# Altium PCB PCB1.PcbDoc
Units mil, origin at the board's own origin, x right, y up, seen from the top; angles counter-clockwise.
Board outline 6000 x 4000 mil, 4 copper layers (Top Layer, Layer 1, Layer 2, Bottom Layer), stack 23.756 mil thick; 28 components, 62 nets, 156 pads, 27 vias.
Unrouted connection lines stored in the file: 83.
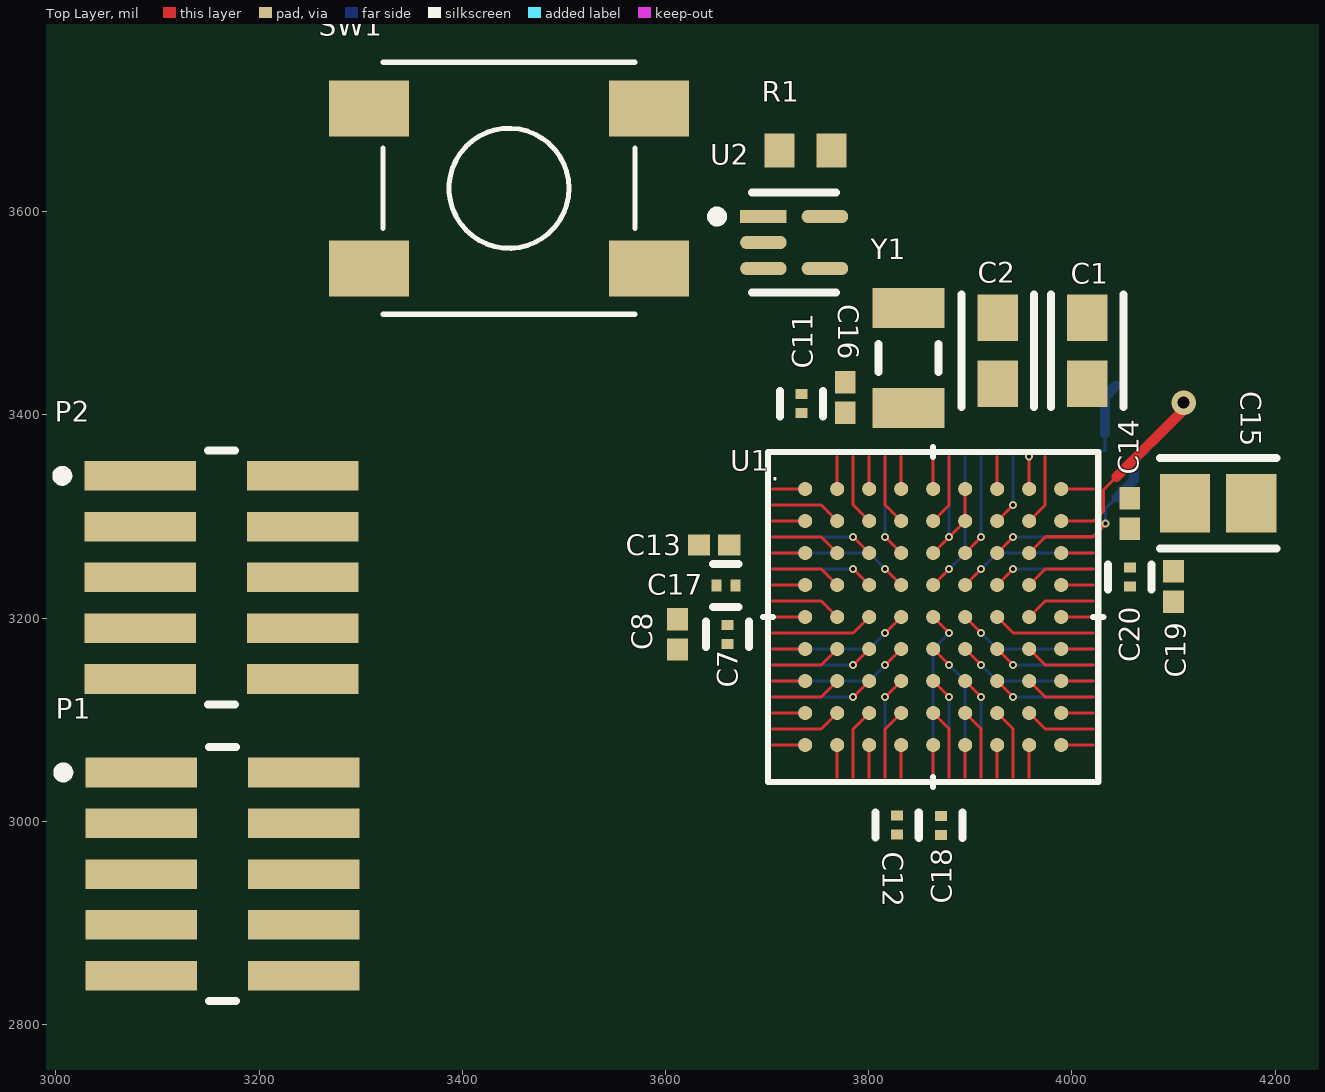
[diagram p0: Top Layer view]
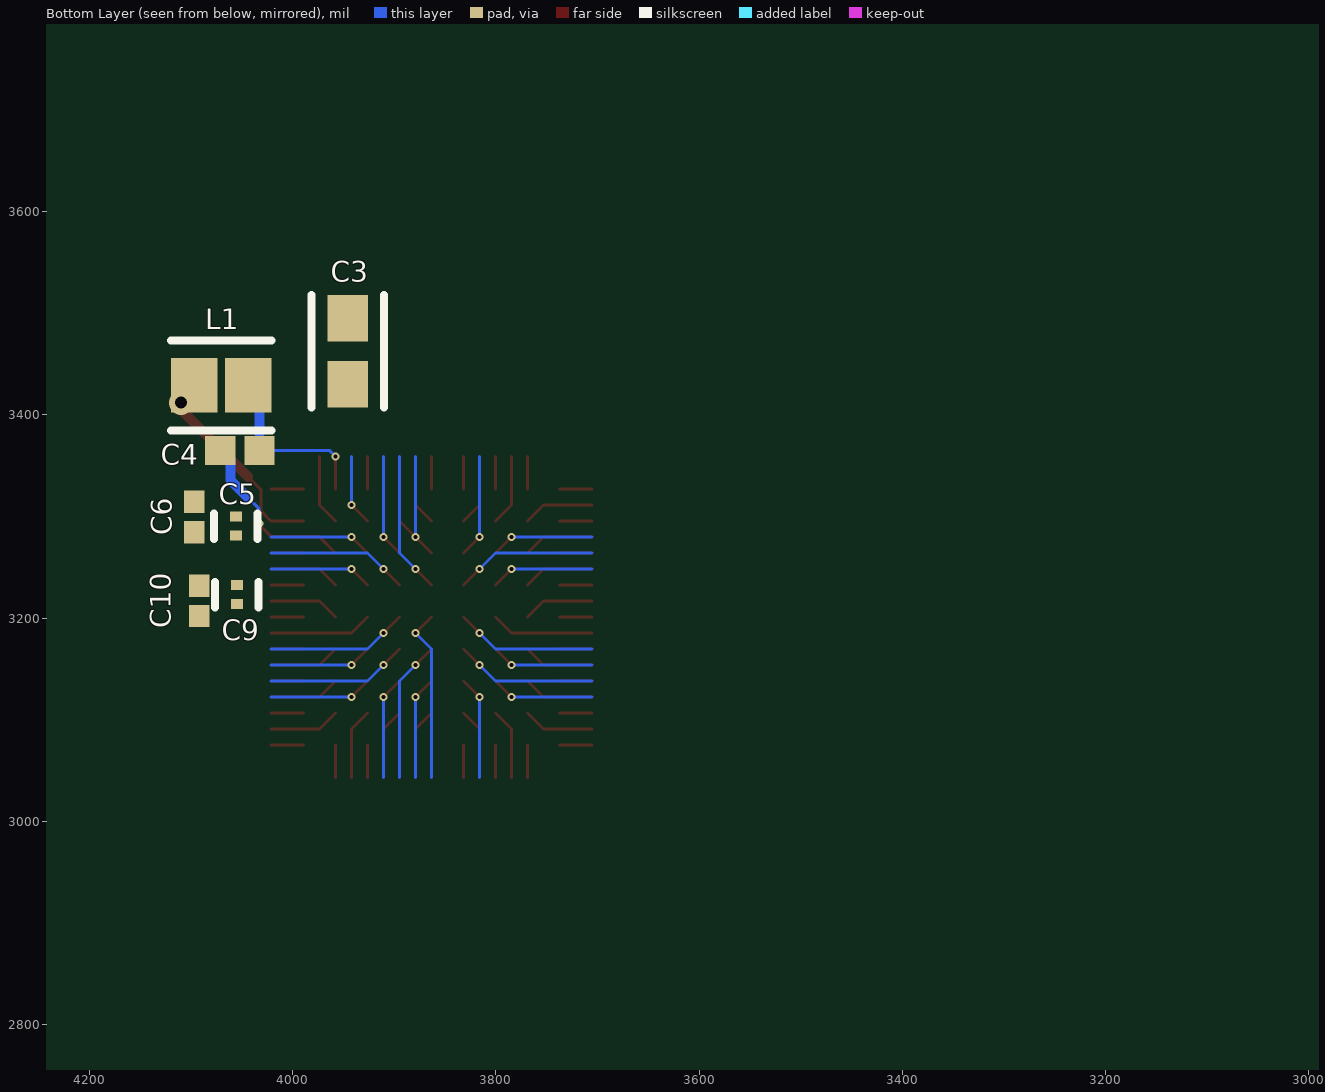
[diagram p1: Bottom Layer view, seen from below]
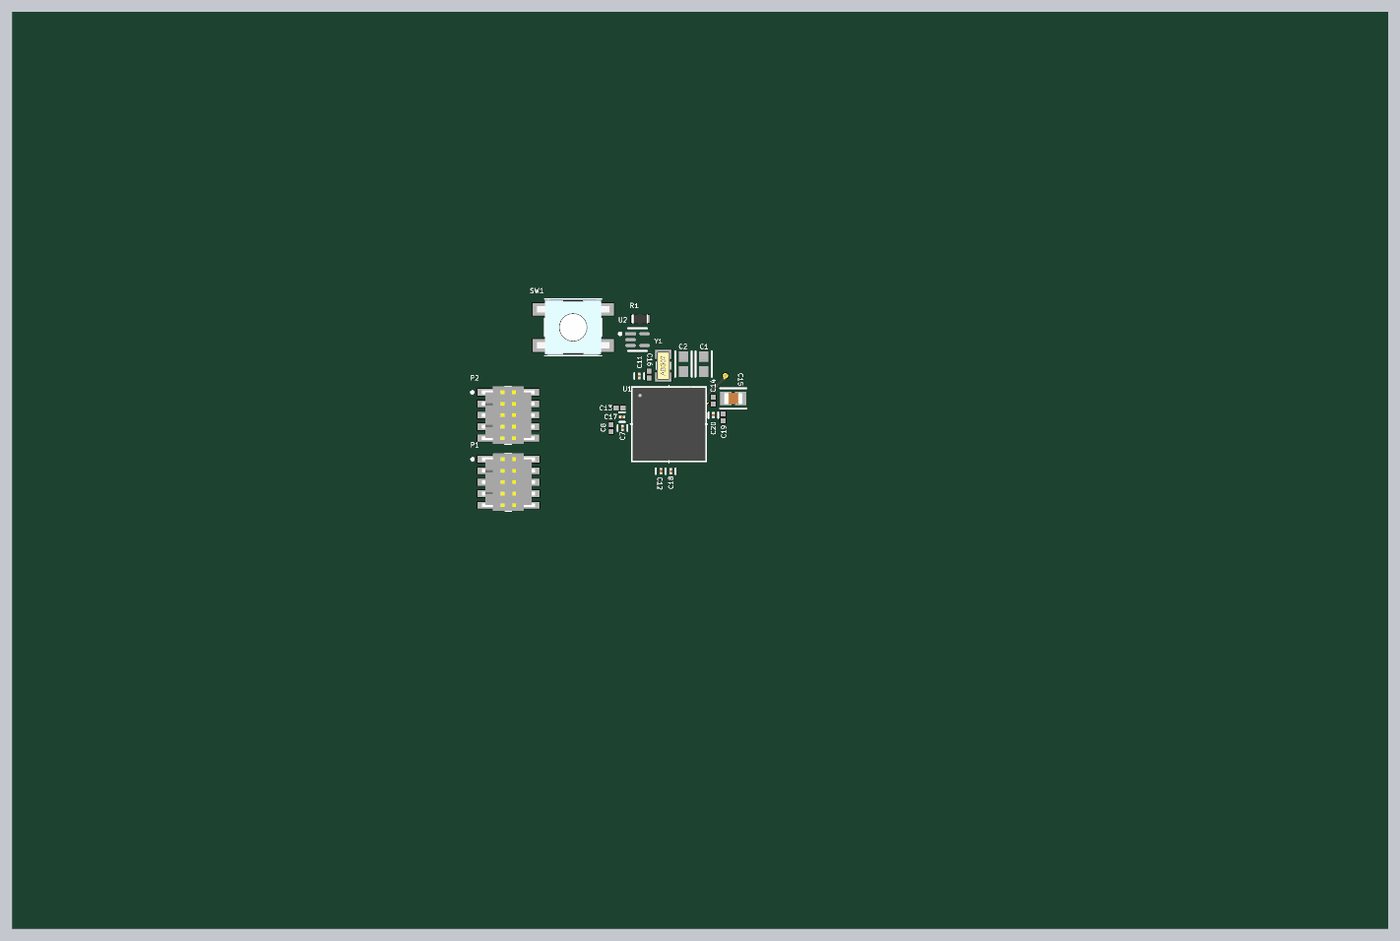
[diagram p2: 3D render of the assembled board from above, using the file's embedded part models]
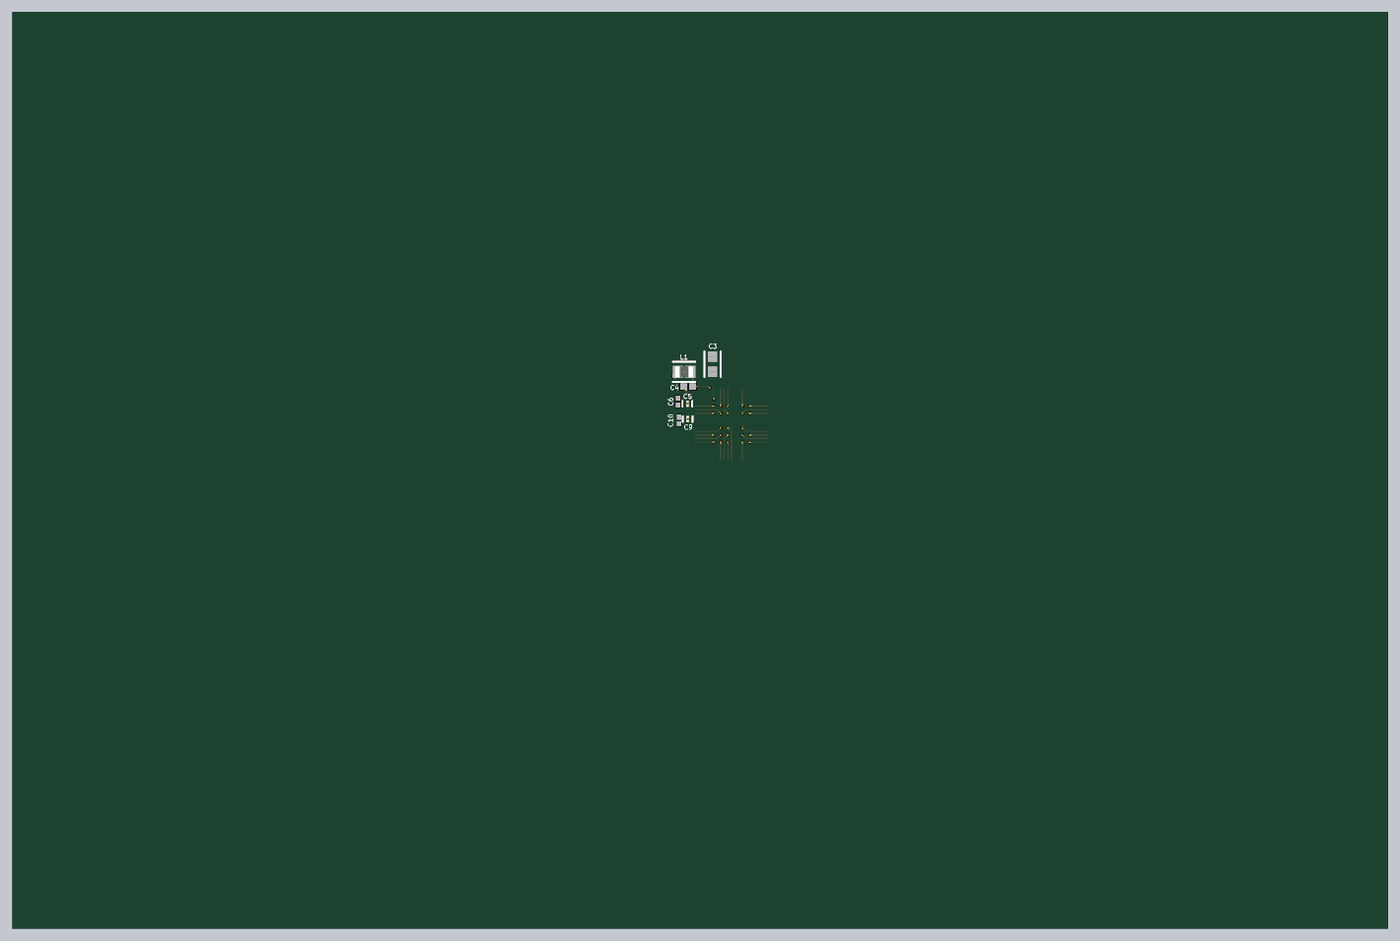
[diagram p3: 3D render of the assembled board from below, using the file's embedded part models]

## Layer stack, top to bottom
Top Solder: solder mask 0.4, Solder Resist, Dk 3.5
Top Layer: signal copper 1.4
Dielectric 2: prepreg 2.8, PP-006, Dk 4.1
Layer 1: signal copper 1.378
Dielectric 1: dielectric 12.6, FR-4, Dk 4.8
Layer 2: signal copper 1.378
Dielectric 3: prepreg 2.8, PP-006, Dk 4.1
Bottom Layer: signal copper 1.4
Bottom Solder: solder mask 0.4, Solder Resist, Dk 3.5

## Board outline
1000,1000 7000,1000 7000,5000 1000,5000

## Design rules (kind name [scope] priority, off if disabled: settings)
Clearance Clearance_BGA [WithinRoom('BGA')] p1: gap=3 ignorepadtopadclearanceinfootprint=FALSE
Clearance Clearance_1 [All] p2: gap=5 ignorepadtopadclearanceinfootprint=FALSE
FanoutControl Fanout_BGA [IsBGA or WithinRoom('BGA')] p1: bgadir=Out bgaviamode=Centered fanoutstyle=BGA fanoutdirection=Alternating viagrid=1 // Fanout_BGA (Default Rule)
PolygonConnect [All] p1: connectstyle=Relief reliefconductorwidth=10 reliefentries=4 polygonreliefangle="90 Angle" airgapwidth=10
RoomDefinition BGA [InComponentClass('Room Definition 1')] p1: confinementstyle=ConfineIn formatcopy=TRUE lockcomponents=FALSE outline 3683,3020.5 3683,3381.5 4044,3381.5 4044,3020.5
RoutingVias RoutingVias_BGA [WithinRoom('BGA')] p1: holewidth=4 width=8 viastyle="Through Hole" minholewidth=4 minwidth=8 maxholewidth=4 maxwidth=8
RoutingVias RoutingVias_1 [All] p2: holewidth=28 width=50 viastyle="Through Hole" minholewidth=28 minwidth=50 maxholewidth=28 maxwidth=50
SolderMaskExpansion [All] p1: expansion=4 istentingtop=FALSE
Width Width_BGA [WithinRoom('BGA')] p1: maxlimit=3 minlimit=3 preferedwidth=3
Width Width_1 [All] p2: maxlimit=10 minlimit=10 preferedwidth=10
29 further rules are at their usual default settings.

## Classes and differential pairs
component class "Room Definition 1": U1

## Components (designator, comment, footprint, x,y, rotation, side; value= is the part's Value field where it differs from the comment)
C1 "CL10A226MO7JZNC" FP-CL10-IPC_A 4015,3463 r90 top
C2 "CL10A226MO7JZNC" FP-CL10-IPC_A 3927,3463 r90 top
C3 "CL10A226MO7JZNC" FP-CL10-IPC_A 3946,3462.56 r90 bottom
C4 "GRM155R71H332KA01D" CAPC1005X55X25ML05T10 4052,3365 r180 bottom value="3300 pF"
C5 "GRM033R61C104KE14D" FP-GRM033-0_03-MFG 4056,3290.35 r90 bottom
C6 "C0402C105K8PAC7867" CAPC1005X60X30LL05T10 4097,3299.35 r270 bottom value=1uF
C7 "GRM033R61C104KE14D" FP-GRM033-0_03-MFG 3661,3184 r270 top
C8 "C0402C105K8PAC7867" CAPC1005X60X30LL05T10 3612,3184 r90 top value=1uF
C9 "GRM033R61C104KE14D" FP-GRM033-0_03-MFG 4055,3223 r270 bottom
C10 "C0402C105K8PAC7867" CAPC1005X60X30LL05T10 4092,3217 r90 bottom value=1uF
C11 "GRM033R61C104KE14D" FP-GRM033-0_03-MFG 3734,3411 r90 top
C12 "GRM033R61C104KE14D" FP-GRM033-0_03-MFG 3828,2996.35 r270 top
C13 "C0402C105K8PAC7867" CAPC1005X60X30LL05T10 3648,3272 r0 top value=1uF
C14 "C0402C105K8PAC7867" CAPC1005X60X30LL05T10 4057,3303 r270 top value=1uF
C15 "GRM21BR61A476ME15K" FP-GRM21B-0_2-e0_2_0_7-IPC_B 4144,3313 r0 top
C16 "C0402C105K8PAC7867" CAPC1005X60X30LL05T10 3777,3417 r270 top value=1uF
C17 "GRM033R61C104KE14D" FP-GRM033-0_03-MFG 3659.35,3232 r180 top
C18 "GRM033R61C104KE14D" FP-GRM033-0_03-MFG 3871,2996 r270 top
C19 "C0402C105K8PAC7867" CAPC1005X60X30LL05T10 4100,3231.04 r90 top value=1uF
C20 "GRM033R61C104KE14D" FP-GRM033-0_03-MFG 4057,3240.35 r270 top
L1 "MLP2012H2R2MT0S1" FP-MLP2012M-IPC_C 4070.39,3429 r0 bottom
P1 "FTSH-105-01-L-DV-K" SMTC-FTSH-105-01-L-DV-K_V 3164,2948 r270 top
P2 "FTSH-105-01-L-DV-K" SMTC-FTSH-105-01-L-DV-K_V 3163,3240 r270 top
R1 "ERJ3EKF1002V" RESC1609X55X30LL15T15 3738,3660 r180 top
SW1 "430481025816" 430481025816 3446,3623 r0 top
U1 "MAX78000EXG+" 21-0735_MXM 3863.5,3201 r0 top
U2 "SN74LVC1G07DCKR" FP-DCK0005A-IPC_C 3726.68,3569.59 r0 top
Y1 "ABS07-120-32.768KHZ-T" ABRA-ABS07_A_V 3839,3456 r90 top

## Footprints (in the part's own frame and the unit in brackets; to place one, negate y for a bottom-side part, rotate by r counter-clockwise, add the part's x,y. Pads: shape width x height; smd on the part's side, far side on the other; paste and mask are expansions set on the pad)
21-0735_MXM [mil]
  round 14 smd paste+0 mask+0: A1(-125.98,125.98) A2(-94.49,125.98) A3(-62.99,125.98) A4(-31.5,125.98) A5(0,125.98) A6(31.5,125.98) A7(62.99,125.98) A8(94.49,125.98) A9(125.98,125.98) B1(-125.98,94.49) B2(-94.49,94.49) B3(-62.99,94.49) B4(-31.5,94.49) B5(0,94.49) B6(31.5,94.49) B7(62.99,94.49) B8(94.49,94.49) B9(125.98,94.49) C1(-125.98,62.99) C2(-94.49,62.99) C3(-62.99,62.99) C4(-31.5,62.99) C5(0,62.99) C6(31.5,62.99) C7(62.99,62.99) C8(94.49,62.99) C9(125.98,62.99) D1(-125.98,31.5) D2(-94.49,31.5) D3(-62.99,31.5) D4(-31.5,31.5) D5(0,31.5) D6(31.5,31.5) D7(62.99,31.5) D8(94.49,31.5) D9(125.98,31.5) E1(-125.98,0) E2(-94.49,0) E3(-62.99,0) E4(-31.5,0) E5(0,0) E6(31.5,0) E7(62.99,0) E8(94.49,0) E9(125.98,0) F1(-125.98,-31.5) F2(-94.49,-31.5) F3(-62.99,-31.5) F4(-31.5,-31.5) F5(0,-31.5) F6(31.5,-31.5) F7(62.99,-31.5) F8(94.49,-31.5) F9(125.98,-31.5) G1(-125.98,-62.99) G2(-94.49,-62.99) G3(-62.99,-62.99) G4(-31.5,-62.99) G5(0,-62.99) G6(31.5,-62.99) G7(62.99,-62.99) G8(94.49,-62.99) G9(125.98,-62.99) H1(-125.98,-94.49) H2(-94.49,-94.49) H3(-62.99,-94.49) H4(-31.5,-94.49) H5(0,-94.49) H6(31.5,-94.49) H7(62.99,-94.49) H8(94.49,-94.49) H9(125.98,-94.49) J1(-125.98,-125.98) J2(-94.49,-125.98) J3(-62.99,-125.98) J4(-31.5,-125.98) J5(0,-125.98) J6(31.5,-125.98) J7(62.99,-125.98) J8(94.49,-125.98) J9(125.98,-125.98)
  silkscreen extent -168,-168 168,168, body extent -157,-157 157,157, height 51
430481025816 [mm] "6*6mm vertical type,SMD, height 2.5mm, black actuator, 160gf, T&R"
  rect 2x1.4 smd: 1(-3.5,2) 2(3.5,2) 3(-3.5,-2) 4(3.5,-2)
  silkscreen extent -3.15,-3.15 3.15,3.15, body extent -4,-3.1 4,3.1, height 2.49
ABRA-ABS07_A_V [mm] "SMD, 2-Leads, Body 3.2x1.5mm"
  rect 1x1.8 smd: 1(-1.25,0) 2(1.25,0)
  silkscreen extent -0.35,-0.75 0.35,0.75, body extent -1.6,-0.75 1.6,0.75, height 0.9
CAPC1005X55X25ML05T10 [mm] "Chip Capacitor, 2-Leads, Body 1.00x0.50mm, IPC Low Density"
  rect 0.76x0.72 smd: 1(-0.49,0) 2(0.49,0)
  body extent -0.53,-0.28 0.53,0.27, height 0.55
CAPC1005X60X30LL05T10 [mm] "Chip Capacitor, 2-Leads, Body 1.00x0.50mm, IPC High Density"
  rect 0.56x0.52 smd: 1(-0.38,0) 2(0.38,0)
  body extent -0.53,-0.28 0.53,0.28, height 0.6
FP-CL10-IPC_A [mil]
  rect 45.6x39.85 smd paste+0 mask+0: 1(-32.56,0) 2(32.56,0)
  silkscreen extent -55,-36 55,36, body extent -31,-16 31,16, height 36
FP-DCK0005A-IPC_C [mm]
  rect 1.164x0.336 smd paste+0 mask+0: 1(-0.77,0.65)
  rrect100% 1.164x0.336 smd paste+0 mask+0: 2(-0.77,0) 3(-0.77,-0.65) 4(0.77,-0.65) 5(0.77,0.65)
  silkscreen extent -2.05,-1.25 1.05,1.25
FP-GRM21B-0_2-e0_2_0_7-IPC_B [mil]
  rect 49.4x57.33 smd paste+0 mask+0: 1(-32.51,0) 2(32.51,0)
  silkscreen extent -57,-44 57,44, body extent -67,-39 67,39, height 10
FP-GRM033-0_03-MFG [mm]
  rect 0.25x0.3 smd paste+0 mask+0: 1(-0.238,0) 2(0.238,0)
  silkscreen extent -0.32,-0.54 0.32,0.54, body extent -0.3,-0.15 0.3,0.15, height 0.33
FP-MLP2012M-IPC_C [mil]
  rect 45.45x53.39 smd paste+0 mask+0: 1(-26.61,0) 2(26.61,0)
  silkscreen extent -49,-44 49,44, body extent -39,-25 39,25, height 40
RESC1609X55X30LL15T15 [mm] "Chip Resistor, 2-Leads, Body 1.75x0.95mm, IPC High Density"
  rect 0.75x0.85 smd: 1(-0.65,0) 2(0.65,0)
  body extent -0.87,-0.48 0.87,0.48, height 0.55
SMTC-FTSH-105-01-L-DV-K_V [mm] "CONN, 10-Leads, Body 6.35x3.43mm, Pitch 1.27mm"
  rect 0.74x2.79 smd: 1(-2.54,-2.035) 2(-2.54,2.035) 3(-1.27,-2.035) 4(-1.27,2.035) 5(0,-2.035) 6(0,2.035) 7(1.27,-2.035) 8(1.27,2.035) 9(2.54,-2.035) 10(2.54,2.035)
  silkscreen extent -3.17,-4.1 3.17,0.34, body extent -3.17,-2.92 3.18,2.92, height 6.12

## Part data
C1 C2 C3: library part CMP-13271-002755-1, "Cap Ceramic 22uF 16V X5R ±20% Pad SMD 0603 +85°C T/R", Capacitance=22uF, Case Code (Imperial)=0603, Case Code (Metric)=1608, Max Operating Temperature=85°C, Min Operating Temperature=-55°C, Tolerance=20%, Voltage Rating=16V, Case/Package=0603, Mount="Surface Mount", Packaging="Tape and Reel"
C4: library part CMP-2008-04658-1, Manufacturer=Murata, Part Number=GRM155R71H332KA01D
C5 C7 C9 C11 C12 C17 C18 C20: library part CMP-06035-039275-1, "Chip Multilayer Ceramic Capacitors for General Purpose, 0201, 0.10uF, X5R, 15%, 10%, 16V", Capacitance=100nF, Dielectric=X5R, Tolerance=10%, Voltage Rating (DC)=16V, Length=600um, Thickness=300um, Width=300um
C6 C8 C10 C13 C14 C16 C19: library part CMP-2008-02081-1, Manufacturer=Kemet, Part Number=C0402C105K8PAC7867
C15: library part CMP-06035-042633-1, "Chip Multilayer Ceramic Capacitors for General Purpose, 0805, 47uF, X5R, 15%, 20%, 10V", Capacitance=47uF, Case Code (Imperial)=0805, Case Code (Metric)=2012, Dielectric=X5R, Max Operating Temperature=85°C, Min Operating Temperature=-55°C, Package Quantity=10000, Tolerance=20%, Voltage Rating=10V, Case/Package=0805, Length=0.079inch, Mount="Surface Mount", Packaging="Tape and Reel", Termination=SMD/SMT, Thickness=0.057inch, Voltage Rating (DC)=10V, Weight=0.000335oz, Width=0.049inch
L1: library part CMP-08253-000154-1, "Shielded Multilayer Inductor 2.2uH ±20% 1000mA 195mΩ SMD 0805", Case Code (Imperial)=0805, Case Code (Metric)=2012, Current Rating=1A, DC Resistance (DCR)=195mR, Inductance=2.2uH, Max Operating Temperature=125°C, Min Operating Temperature=-40°C, Package Quantity=4000, Test Frequency=2MHz, Tolerance=20%, Case/Package=0805, Core Material=Ferrite, Height - Seated (Max)=0.039inch, Lead Free="Lead Free", Length=0.079inch, Mount="Surface Mount", Packaging="Tape and Reel", RoHS Compliant=Yes, Shielding=Shielded, Width=0.049inch
P1 P2: library part CMP-2000-05353-1, "Male Header, Pitch 1.27 mm, 2 x 5 Position, Height 6.25 mm", Color=Black, Manufacturer=Samtec, Package Description="Male Header, Pitch 1.27 mm, 2 x 5 Position, Height 5.97 mm, Tail Length 4.32 mm", Standard Package=1, Category=Connectors,Interconnects, Connector Type=Header,Unshrouded, Contact Finish=Gold, Contact Finish Thickness=10µin(0.25µm), Contact Mating Length="0.120\"(3.05mm)", Contact Type=MalePin, Datasheet URL=http://suddendocs.samtec.com/prints/ftsh-1xx-xx-xxx-dv-xxx-mkt.pdf, Datasheet Version="Rev. ET, 10/1995", Family=RectangularConnectors-Headers,MalePins, Manufacturer URL=http://www.samtec.com/, Mating Products="SFMC-105-L2-S-D-TR-ND / -CONN.05\"SURFACE10POSSMT / FLE-105-01-G-DV-TR-ND / -CONNSKT1.27MM10POSDUALSMD / FLE-105-01-G-DV-A-P-ND / -CONNSKT1.27MM10POSDUALSMD / FLE-105-01-G-DV-A-ND / -CONNSKT1.27MM10POSDUALSMD / CLP-105-02-G-D-P-TR-ND / -CONNRCPT10POSDUAL.05\"SMD / SAM1155-05-ND / -CONNRCPT10POSDUAL.05\"SMD / SAM1154-05-ND / -CONNRCPT10POSDUAL.05\"SMD / SAM1153-05-ND / -CONNRCPT10POSDUAL.05\"SMD / SAM1226-05-ND / -CONNRCPT.05\"10POSDUALSMD", Mounting Type=SurfaceMount, Number of Positions=10, Number of Positions Loaded=All, Number of Rows=2, Other Names=Q3937619, Package Reference=FTSH-105-01-L-DV-K, Package URL=http://suddendocs.samtec.com/prints/ftsh-1xx-xx-xxx-dv-xxx-footprint.pdf, Packaging=Tube, Pitch="0.050\"(1.27mm)", Product Training Modules=Board-to-BoardConnectors, Row Spacing="0.050\"(1.27mm)", Series=FTSH, Termination=Solder
R1: library part CMP-1012-00623-3, "Chip Resistor, 10 KOhm, +/- 1%, 0.1 W, -55 to 155 degC, 0603 (1608 Metric), RoHS, Tape and Reel", Case Code (Imperial)=0603, Case Code (Metric)=1608, Manufacturer=Panasonic, Max Operating Temperature=155degC, Max Power Dissipation=100mW, Min Operating Temperature=-55degC, Package Description="2-Pin Surface Mount Device, Body 1.6 x 0.85 mm", Package Quantity=1, Package Reference=603, Resistance=10KOhm, Temperature Coefficient=100ppm\/degreesC, Tolerance=1%, Voltage Rating=75V, Case\/Package=0603, Composition=ThickFilm, Contact Plating=Tin, Datasheet URL=https://industrial.panasonic.com/cdbs/www-data/pdf/RDA0000/AOA0000C304.pdf, Datasheet Version=02/2017, Depth=0.8mm, Height=0.45mm, Lead Free=LeadFree, Length=1.6mm, Manufacturer URL=http://www.panasonic.com/, Military Standard=Not, Mount=SurfaceMount, Mounting Technology=SurfaceMount, Number of Pins=2, Number of Terminations=2, Packaging=TapeandReel, Power Rating=100mW, Radiation Hardening=No, REACH SVHC=NoSVHC, RoHSCompliant=true, Termination=SMD/SMT, Voltage Rating (DC)=75V, Width=0.031inch
SW1: library part CMP-1452-00025-1, "WS-TASV SMD Tact Switch 6X6 mm", Manufacturer="Wuerth Elektronik", ComponentLink1Description="Manufacturer URL", ComponentLink1URL=http://www.we-online.com, ComponentLink2Description=Datasheet, ComponentLink2URL=http://katalog.we-online.de/em/datasheet/4304x1.pdf, NoPins=04, PackageReference=430481025816, PartNumber=430481025816
U1: "No Description Available", Built_By=EMA_April, Copyright="Copyright (C) 2018 Accelerated Designs. All rights reserved", Manufacturer_Part_Number=MAX78000EXG+, RefDes=RefDes, SourceLibrary=Add_to_database_2021-03-26, Type=DEV, Vendor="Maxim Integrated Products"
U2: library part CMP-0859-00290-4, "IC BUFF/DVR NON-INVERT SC70-5", Case/Package=SC, High Level Output Current=32mA, Max Operating Temperature=125°C, Max Supply Voltage=5.5V, Min Operating Temperature=-40°C, Min Supply Voltage=1.65V, Nominal Supply Current=40mA, Package Quantity=1, Quiescent Current=10uA, Contact Plating=Gold, Lead Free="Lead Free", Logic Function=Buffer, Low Level Output Current=32mA, Mount="Surface Mount", Number of Bits=1, Number of Bits per Element=1, Number of Channels=1, Number of Circuits=1, Number of Elements=1, Number of Gates=1, Number of Input Lines=1, Number of Inputs=1, Number of Output Lines=1, Number of Outputs=1, Number of Pins=5, Packaging="Tape and Reel", Polarity=Non-Inverting, Propagation Delay=8.3ns, Radiation Hardening=No, REACH SVHC="No SVHC", Termination=SMD/SMT, Turn-On Delay Time=8.3ns
Y1: library part CMP-2000-07587-1, "Tuning Fork Crystal, 32.768 KHz, +/- 20 ppm, -40 to 85 degC, 2-Pin SMD, RoHS, Tape and Reel", Case\/Package=SMD/SMT, ESR (Equivalent Series Resistance)=55KOhm, Frequency=32.768KHz, Frequency Tolerance=20ppm, Load Capacitance=6pF, Manufacturer=Abracon, Max Operating Temperature=85degC, Min Operating Temperature=-40degC, Package Description="2-Pin Surface Mount Device, Body 3.2 x 1.5 mm", Package Quantity=3000, Package Reference=ABS07, Series Resistance=60KOhm, Datasheet URL=http://www.abracon.com/Resonators/ABS07-120-32.768kHz-T.pdf, Datasheet Version=11/2014, Depth=1.5mm, Height=0.035inch, Lead Free=LeadFree, Length=3.2mm, Manufacturer URL=http://www.abracon.com/, Mount=SurfaceMount, Mounting Technology=SurfaceMount, Number of Pins=2, Packaging=TapeandReel, Radiation Hardening=No, REACH SVHC=NoSVHC, RoHSCompliant=True, Termination=SMD/SMT, Tolerance=20ppm, Width=0.061inch

## Via types
v1: diameter 8, hole 4, Top Layer to Bottom Layer, 26 vias
v2: diameter 24, hole 12, Top Layer to Bottom Layer, 1 vias

## Nets (pads, with @x,y where several pads share a name; then routed paths per layer and width w, separated by ;. In a path a pad name is that pad's centre, name@x,y a point inside that pad or via, vN(x,y) a via of type N, cw(c..) or ccw(c..) an arc to the next point about the centre after c; other vN are vias at no path point)
1V8: P1.1 P2.1
3V3_VREGI: C11.1 C12.1 C13.2 C14.2 C15.1 U1.A3 U1.C1 U1.C6 U1.C9 U1.J4 | length 229.5
  Top Layer w3: 3705.51,3263.99 U1.C1 ; U1.A3 3800.5,3358.98 ; 3832,3043.02 U1.J4 ; U1.C6 v1(3910.74,3279.74) ; U1.C9 4021.48,3263.99
  Bottom Layer w3: v1(3910.74,3279.74) 3910.74,3358.98
AIN0: U1.D7 | length 101.5
  Top Layer w3: U1.D7 v1(3942.24,3248.24)
  Bottom Layer w3: v1(3942.24,3248.24) 4021.48,3248.24
AIN1: U1.E8 | length 70
  Top Layer w3: U1.E8 3973.73,3216.75 4021.48,3216.75
AIN2: U1.E7 | length 101.5
  Top Layer w3: U1.E7 3942.24,3185.25 4021.48,3185.25
AIN3: U1.F9 | length 32
  Top Layer w3: U1.F9 4021.48,3169.5
AIN4: U1.F8 | length 70
  Top Layer w3: U1.F8 3973.73,3153.76 4021.48,3153.76
AIN5: U1.F7 | length 101.5
  Top Layer w3: U1.F7 v1(3942.24,3153.76)
  Bottom Layer w3: v1(3942.24,3153.76) 4021.48,3153.76
AIN6: U1.G8 | length 70
  Top Layer w3: U1.G8 3973.73,3122.26 4021.48,3122.26
AIN7: U1.G9 | length 32
  Top Layer w3: U1.G9 4021.48,3138.01
EXTERNAL_RST: P1.10 R1.2 SW1.1 SW1.2 U2.2
GND: C1.2 C2.2 C3.2 C5.2 C6.1 C7.2 C8.1 C9.2 C10.1 C11.2 C12.2 C13.1 C14.1 C15.2 C16.1 C17.2 C18.2 C19.1 C20.2 P1.3 P1.5 P1.9 P2.3 P2.5 P2.9 SW1.3 SW1.4 U1.A1 U1.A6 U1.A9 U1.B6 U1.C4 U1.C5 U1.E9 U1.J6 U2.3 | length 384.8
  Top Layer w3: 3705.51,3326.98 U1.A1 ; v1(3816.25,3279.74) U1.C4 ; U1.C5 v1(3879.24,3279.74) U1.B6 U1.A6 ; 3894.99,3043.02 U1.J6 ; U1.E9 4021.48,3201 ; U1.A9 4021.48,3326.98
  Bottom Layer w3: v1(3816.25,3279.74) 3816.25,3358.98 ; v1(3879.24,3279.74) 3879.24,3358.98
I2C0_SCL: U1.E6 | length 139.5
  Top Layer w3: U1.E6 v1(3910.74,3185.25)
  Bottom Layer w3: v1(3910.74,3185.25) 3926.49,3169.5 4021.48,3169.5
I2C0_SDA: U1.D6 | length 139.5
  Top Layer w3: U1.D6 v1(3910.74,3248.24)
  Bottom Layer w3: v1(3910.74,3248.24) 3926.49,3263.99 4021.48,3263.99
I2C1_SCL: U1.D5 | length 139.5
  Top Layer w3: U1.D5 v1(3879.24,3248.24)
  Bottom Layer w3: v1(3879.24,3248.24) 3894.99,3263.99 3894.99,3358.98
I2C1_SDA: U1.H4 | length 70
  Top Layer w3: 3816.25,3043.02 3816.25,3090.76 U1.H4
I2C2_SCL: U1.H1 | length 32
  Top Layer w3: 3705.51,3106.51 U1.H1
I2C2_SDA: U1.G2 | length 70
  Top Layer w3: 3705.51,3122.26 3753.26,3122.26 U1.G2
I2S_CLKEXT: U1.F5 | length 139.5
  Top Layer w3: U1.F5 v1(3879.24,3153.76)
  Bottom Layer w3: v1(3879.24,3153.76) 3894.99,3138.01 3894.99,3043.02
I2S_SCK: P2.8 U1.F2 | length 70
  Top Layer w3: 3705.51,3153.76 3753.26,3153.76 U1.F2
I2S_SDI: U1.D2 | length 70
  Top Layer w3: 3705.51,3248.24 3753.26,3248.24 U1.D2
I2S_SDO: U1.D3 | length 101.5
  Top Layer w3: v1(3784.76,3248.24) U1.D3
  Bottom Layer w3: 3705.51,3248.24 v1(3784.76,3248.24)
I2S_WS: P2.6 U1.E2 | length 70
  Top Layer w3: 3705.51,3216.75 3753.26,3216.75 U1.E2
NetC4_1: C4.1 U1.C8 | length 175.9
  Top Layer w3: U1.C8 3973.99,3280 4021,3280 4033,3292 v1(4033,3293)
  Bottom Layer w3: v1(4033,3293) 4033,3307.5 4044,3318.49
  Bottom Layer w10: 4044,3318.49 4061.33,3335.83 4061.33,3355.83 4070.5,3365 C4.1
NetC4_2: C4.2 L1.1 U1.A8 | length 177.8
  Top Layer w3: U1.A8 v1(3957.98,3358.98)
  Bottom Layer w3: v1(3957.98,3358.98) 3964,3365 C4.2 4032.71,3381.5
  Bottom Layer w10: 4032.71,3381.5 4032.71,3417.93 L1.1
NetL1_2: L1.2 U1.B9 | length 185.2
  Top Layer w3: U1.B9 4021.48,3295.49 4031,3305.01 4031,3326 4044,3339
  Top Layer w10: 4044,3339 4110,3405 v2(4110,3412)
NetU1_A5: U1.A5 Y1.2 | length 32
  Top Layer w3: U1.A5 3863.5,3358.98
NetU1_B4: U1.B4 U2.4 | length 70
  Top Layer w3: 3816.25,3358.98 3816.25,3311.24 U1.B4
NetU1_B5: U1.B5 Y1.1 | length 70
  Top Layer w3: U1.B5 3879.24,3311.24 3879.24,3358.98
OWM_IO: U1.G4 U1.G7 | length 203
  Top Layer w3: v1(3816.25,3122.26) U1.G4 ; U1.G7 v1(3942.24,3122.26)
  Bottom Layer w3: 3816.25,3043.02 v1(3816.25,3122.26) ; v1(3942.24,3122.26) 4021.48,3122.26
OWM_PE: U1.F4 U1.H6 | length 209.6
  Top Layer w3: v1(3816.25,3153.76) U1.F4 ; U1.H6 3910.74,3090.76 3910.74,3043.02
  Bottom Layer w3: 3705.51,3138.01 3800.5,3138.01 v1(3816.25,3153.76)
PCIF_D0: U1.E4 | length 139.5
  Top Layer w3: v1(3816.25,3185.25) U1.E4
  Bottom Layer w3: 3705.51,3169.5 3800.5,3169.5 v1(3816.25,3185.25)
PCIF_D1: U1.D4 | length 139.5
  Top Layer w3: v1(3816.25,3248.24) U1.D4
  Bottom Layer w3: 3705.51,3263.99 3800.5,3263.99 v1(3816.25,3248.24)
PCIF_D2: U1.J3 | length 32
  Top Layer w3: 3800.5,3043.02 U1.J3
PCIF_D3: U1.H3 | length 70
  Top Layer w3: 3784.76,3043.02 3784.76,3090.76 U1.H3
PCIF_D4: U1.G3 | length 101.5
  Top Layer w3: v1(3784.76,3122.26) U1.G3
  Bottom Layer w3: 3705.51,3122.26 v1(3784.76,3122.26)
PCIF_D5: U1.F3 | length 101.5
  Top Layer w3: v1(3784.76,3153.76) U1.F3
  Bottom Layer w3: 3705.51,3153.76 v1(3784.76,3153.76)
PCIF_D6: U1.E3 | length 101.5
  Top Layer w3: 3705.51,3185.25 3784.76,3185.25 U1.E3
PCIF_D7: U1.J2 | length 32
  Top Layer w3: 3769.01,3043.02 U1.J2
PCIF_D10: U1.B1 | length 32
  Top Layer w3: 3705.51,3295.49 U1.B1
PCIF_D11: U1.C2 | length 70
  Top Layer w3: 3705.51,3279.74 3753.26,3279.74 U1.C2
PCIF_HSYNC: U1.A2 | length 32
  Top Layer w3: U1.A2 3769.01,3358.98
PCIF_PCLK: U1.B2 | length 70
  Top Layer w3: 3705.51,3311.24 3753.26,3311.24 U1.B2
PCIF_VSYNC: U1.E5 | length 171
  Top Layer w3: U1.E5 v1(3879.24,3185.25)
  Bottom Layer w3: 3863.5,3043.02 3863.5,3169.5 v1(3879.24,3185.25)
QSPI0_MOSI: U1.H7 | length 70
  Top Layer w3: U1.H7 3942.24,3090.76 3942.24,3043.02
QSPI0_SDIO2: U1.G6 | length 101.5
  Top Layer w3: U1.G6 v1(3910.74,3122.26)
  Bottom Layer w3: 3910.74,3043.02 v1(3910.74,3122.26)
QSPI0_SDIO3: U1.F6 | length 139.5
  Top Layer w3: U1.F6 v1(3910.74,3153.76)
  Bottom Layer w3: v1(3910.74,3153.76) 3926.49,3138.01 4021.48,3138.01
QSPI0_SS0: U1.J7 | length 32
  Top Layer w3: 3926.49,3043.02 U1.J7
RV_TCK: P2.4 U1.G1 | length 32
  Top Layer w3: 3705.51,3138.01 U1.G1
RV_TMS: P2.2 U1.F1 | length 32
  Top Layer w3: 3705.51,3169.5 U1.F1
SQWOUT: U1.B3 U1.C3 | length 171.5
  Top Layer w3: v1(3784.76,3279.74) U1.C3 ; 3784.76,3358.98 3784.76,3311.24 U1.B3
  Bottom Layer w3: 3705.51,3279.74 v1(3784.76,3279.74)
SWDCLK: P1.4 U1.J1 | length 32
  Top Layer w3: 3705.51,3075.02 U1.J1
SWDIO: P1.2 U1.H2 | length 70
  Top Layer w3: 3705.51,3090.76 3753.26,3090.76 U1.H2
TMR0A_IOA: U1.J8 | length 32
  Top Layer w3: 3957.98,3043.02 U1.J8
TMR0A_IOB: U1.H8 | length 70
  Top Layer w3: U1.H8 3973.73,3090.76 4021.48,3090.76
TMR1B_IOAN: U1.H5 | length 70
  Top Layer w3: U1.H5 3879.24,3090.76 3879.24,3043.02
TMR1B_IOBN: U1.G5 | length 101.5
  Top Layer w3: U1.G5 v1(3879.24,3122.26)
  Bottom Layer w3: 3879.24,3043.02 v1(3879.24,3122.26)
UART0_RX: P1.8 U1.J9 | length 32
  Top Layer w3: U1.J9 4021.48,3075.02
UART0_TX: P1.6 U1.H9 | length 32
  Top Layer w3: U1.H9 4021.48,3106.51
VCOREA: C3.1 C7.1 C8.2 C9.1 C10.2 U1.B7 U1.D9 U1.E1 | length 134
  Top Layer w3: 3705.51,3201 U1.E1 ; U1.B7 v1(3942.24,3311.24) ; U1.D9 4021.48,3232.5
  Bottom Layer w3: v1(3942.24,3311.24) 3942.24,3359
VREGO_A: C1.1 C5.1 C6.2 C16.2 C17.1 C18.1 R1.1 U1.A4 U1.B8 U1.C7 U1.D1 U1.J5 U2.5 | length 267.5
  Top Layer w3: 3705.51,3232.5 U1.D1 ; U1.A4 3832,3358.98 ; 3863.5,3043.02 U1.J5 ; U1.C7 v1(3942.24,3279.74) ; U1.B8 3973.73,3311.24 3973.73,3359
  Bottom Layer w3: v1(3942.24,3279.74) 4021.48,3279.74
VREGO_B: C2.1 C19.2 C20.1 U1.A7 U1.D8 | length 102
  Top Layer w3: U1.A7 3926.49,3358.98 ; U1.D8 3973.73,3248.24 4021.48,3248.24
pads on no net: P1.7 P2.7 P2.10 U2.1